# Altium PCB LED_Array.PcbDoc
Units mil, origin at the board's own origin, x right, y up, seen from the top; angles counter-clockwise.
Board outline 3000 x 3000 mil, 2 copper layers (Top Layer, Bottom Layer); 17 components, 16 nets, 50 pads, 2 vias.
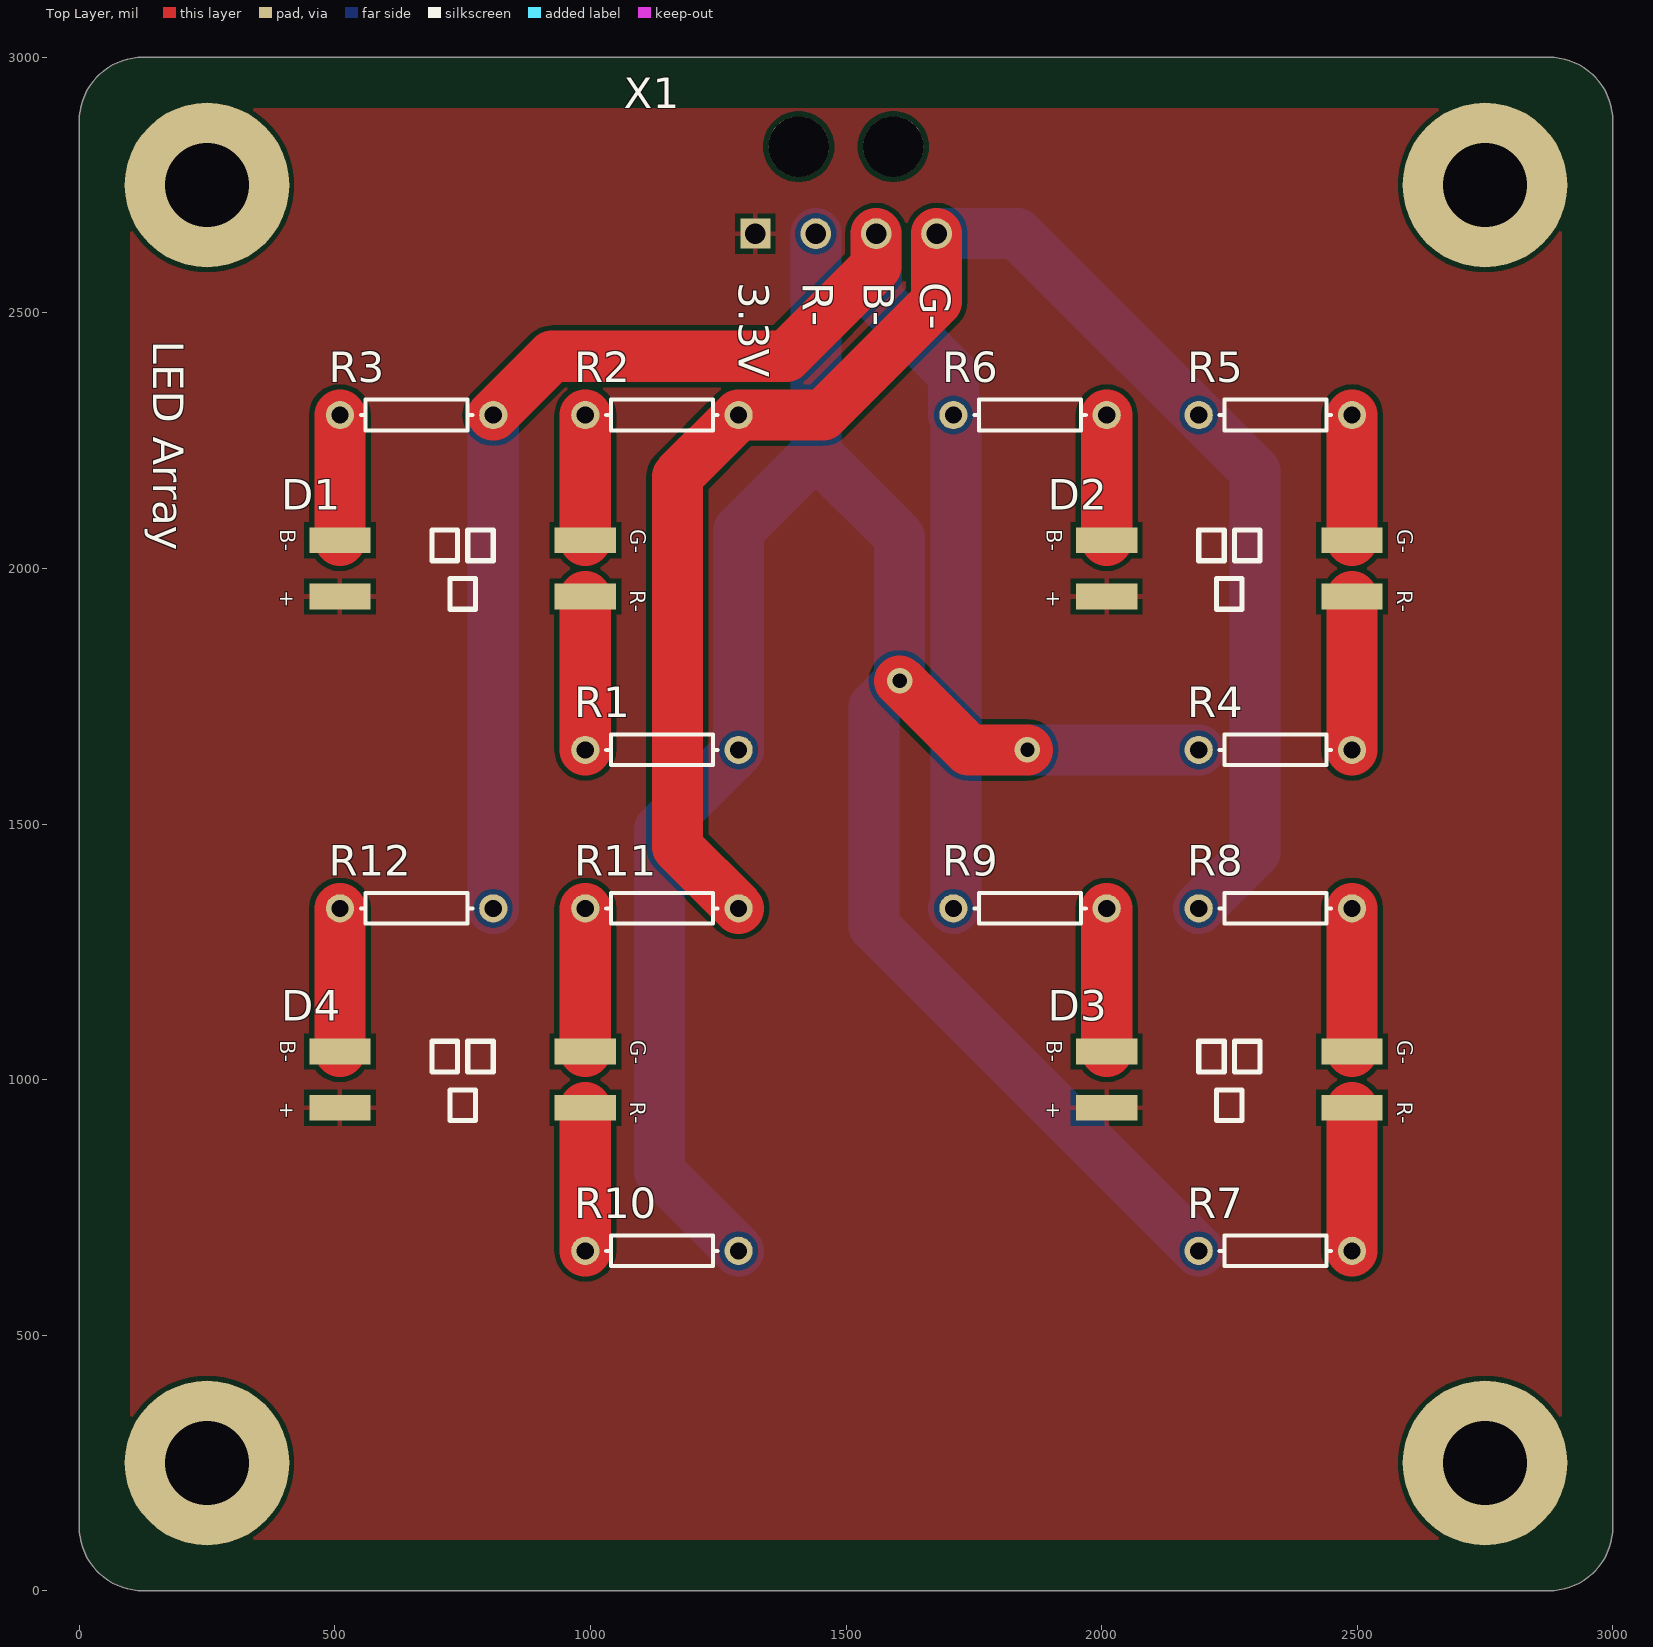
[diagram p0: Top Layer view]
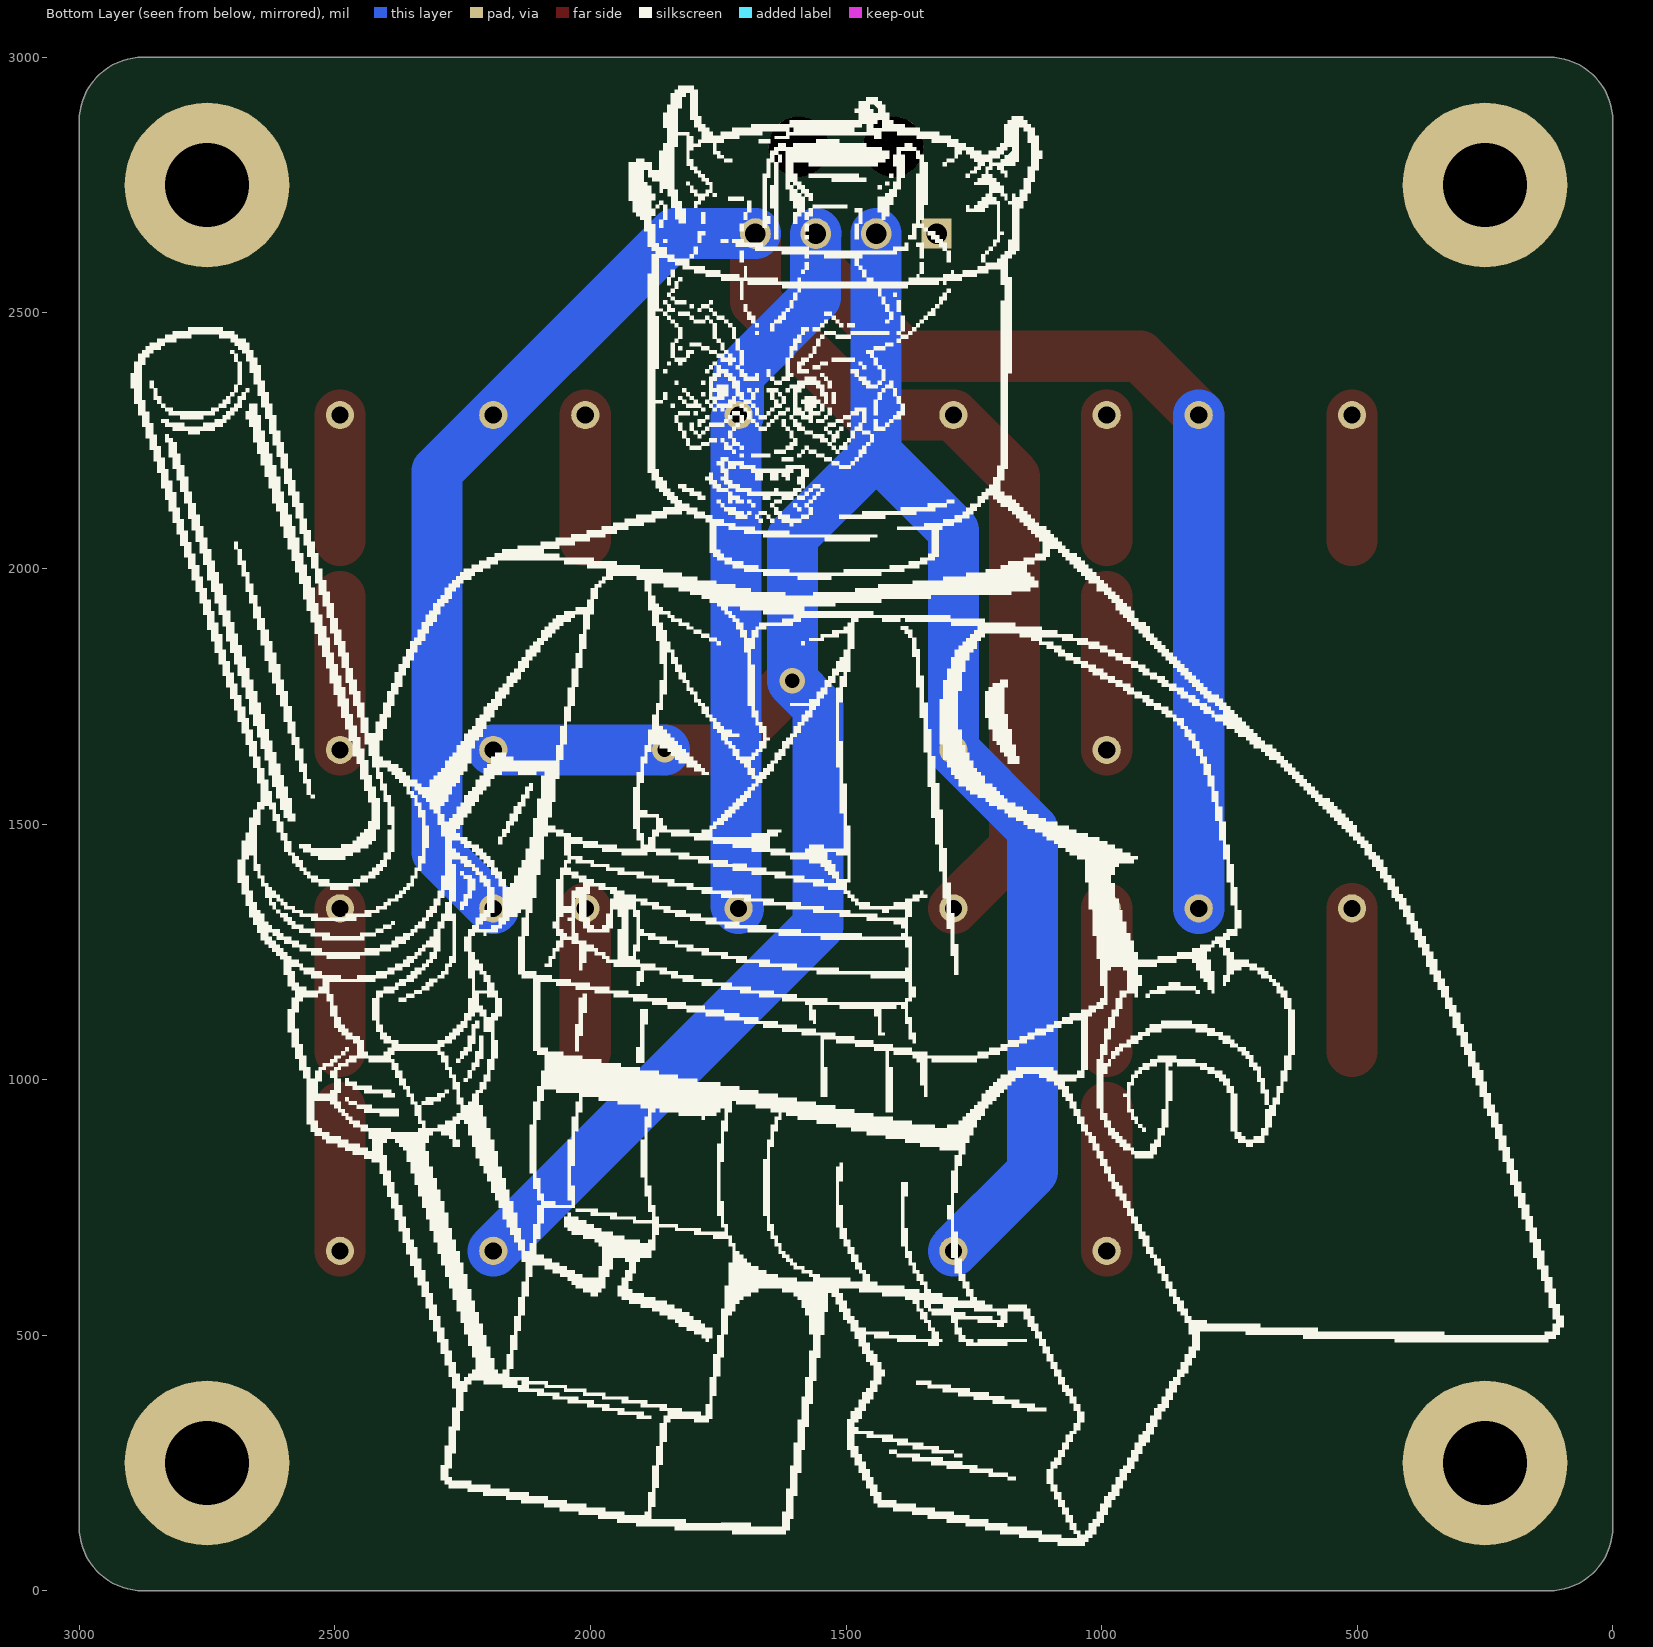
[diagram p1: Bottom Layer view, seen from below]

## Layer stack, top to bottom
Top Solder: solder mask 0.4, Solder Resist, Dk 3.5
Top Layer: signal copper 1.4
Dielectric 1: dielectric 12.6, FR-4, Dk 4.8
Bottom Layer: signal copper 1.4
Bottom Solder: solder mask 0.4, Solder Resist, Dk 3.5

## Board outline
0,125 0,2875 cw(c125,2875) 125,3000 2875,3000 cw(c2875,2875) 3000,2875 3000,125 cw(c2875,125) 2875,0 125,0 cw(c125,125)

## Design rules (kind name [scope] priority, off if disabled: settings)
Clearance [All] p1: gap=10 ignorepadtopadclearanceinfootprint=FALSE except(0: Arc-Hole Track-Hole SMDPad-Hole THPad-Hole Via-Hole Fill-Hole Poly-Hole Region-Hole Text-Hole)
PolygonConnect [All] p1: connectstyle=Relief reliefconductorwidth=10 reliefentries=4 polygonreliefangle="90 Angle" airgapwidth=10
RoutingVias [All] p1: holewidth=28 width=50 viastyle="Through Hole" minholewidth=28 minwidth=50 maxholewidth=28 maxwidth=50
SolderMaskExpansion [isVia] p1: expansion=4 istentingtop=TRUE
Width [All] p1: maxlimit=500 minlimit=10 preferedwidth=10 minimp=50.000000 maximp=50.000000 favimp=50.000000
30 further rules are at their usual default settings.

## Components (designator, comment, footprint, x,y, rotation, side; value= is the part's Value field where it differs from the comment)
D1 "RGBLED" RGBLED 750,2000 r270 top
D2 "RGBLED" RGBLED 2250,2000 r270 top
D3 "RGBLED" RGBLED 2250,1000 r270 top
D4 "RGBLED" RGBLED 750,1000 r270 top
R1 "Res1" AXIAL-0.3 1140,1645 r0 top
R2 "Res1" AXIAL-0.3 1140,2300 r0 top
R3 "Res1" AXIAL-0.3 660,2300 r0 top
R4 "Res1" AXIAL-0.3 2340,1645 r180 top
R5 "Res1" AXIAL-0.3 2340,2300 r180 top
R6 "Res1" AXIAL-0.3 1860,2300 r180 top
R7 "Res1" AXIAL-0.3 2340,665 r180 top
R8 "Res1" AXIAL-0.3 2340,1335 r180 top
R9 "Res1" AXIAL-0.3 1860,1335 r180 top
R10 "Res1" AXIAL-0.3 1140,665 r0 top
R11 "Res1" AXIAL-0.3 1140,1335 r0 top
R12 "Res1" AXIAL-0.3 660,1335 r0 top
X1 "Molex - Micro-Fit 3.0 Series connector,  3.00mm (0.118\") pitch header, 4 positions." 43650-0400 1500,2825 r180 top

## Footprints (in the part's own frame and the unit in brackets; to place one, negate y for a bottom-side part, rotate by r counter-clockwise, add the part's x,y. Pads: shape width x height; smd on the part's side, far side on the other; paste and mask are expansions set on the pad)
43650-0400 [mm]
  round 3 hole 3 unplated: 1(-2.35,0) 1(2.35,0)
  rect 1.482x1.482 / inner rect 1.524x1.524 / far side rect 1.482x1.482 hole 1.02: P$1(4.5,4.32)
  round 1.53 / inner round 1.524 / far side round 1.53 hole 1.02: P$2(1.5,4.32) P$3(-1.5,4.32) P$4(-4.5,4.32)
  body extent -7.82,-4.57 7.83,5.33, height 5.68
AXIAL-0.3 [mm] "Axial Device, Thru-Hole; 2 Leads; 0.3 in Pin Spacing"
  round 1.4 hole 0.85: 1(-3.81,0) 2(3.81,0)
  silkscreen extent -2.77,-0.76 2.77,0.76
RGBLED [mil]
  rect 50x120 smd: 0(55,-240) 1(55,240) 2(-55,240) 3(-55,-240)
  silkscreen extent -75,-60 80,60

## Part data
R1 R2 R3 R4 R5 R6 R7 R8 R9 R10 R11 R12: "Resistor", LatestRevisionDate=17-Jul-2002, LatestRevisionNote="Re-released for DXP Platform.", PackageDescription="Axial Device, Thru-Hole; 2 Leads; 0.3 in Pin Spacing", PackageReference=AXIAL-0.3, Published=8-Jun-2000, Publisher="Altium Limited"
X1: library part HEADER_POS4_?43650-0400, Package=43650-0409, DeviceName=43650-0409, DeviceSetName=HEADER_POS4_?, GateName_1=G$1, LibraryName=con-molex-micro-fit-3_0_2, SymbolName_1=HEADER_POS4

## Free pads (board coordinates)
  round 322 hole 164: ""(250,250) ""(250,2750) ""(2750,250) ""(2750,2750)

## Via types
v1: diameter 50, hole 28, Top Layer to Bottom Layer, tented both sides, 2 vias

## Nets (pads, with @x,y where several pads share a name; then routed paths per layer and width w, separated by ;. In a path a pad name is that pad's centre, name@x,y a point inside that pad or via, vN(x,y) a via of type N, cw(c..) or ccw(c..) an arc to the next point about the centre after c; other vN are vias at no path point)
3.3V: D1.0 D2.0 D3.0 D4.0 X1.P$1
B-: R3.2 R6.2 R9.2 R12.2 X1.P$3 | length 3285.1
  Top Layer w100: R3.2 925,2415 1383.12,2415 1559.06,2590.94 X1.P$3
  Bottom Layer w100: R12.2 R3.2 ; X1.P$3 1560,2653.98 1560,2530 1710,2380 R6.2 1715,2295 1715,1340 R9.2
G-: R2.2 R5.2 R8.2 R11.2 X1.P$4 | length 3392.3
  Top Layer w100: R11.2 1170,1455 1170,2180 R2.2 1455,2300 1677.17,2522.17 X1.P$4
  Bottom Layer w100: X1.P$4 1835.08,2654.92 2300,2190 2300,1445 R8.2
NetD1_1: D1.1 R1.1 | length 300
  Top Layer w100: R1.1 D1.1
NetD1_2: D1.2 R2.1 | length 245
  Top Layer w100: D1.2 R2.1
NetD1_3: D1.3 R3.1 | length 245
  Top Layer w100: D1.3 R3.1
NetD2_1: D2.1 R4.1 | length 300
  Top Layer w100: R4.1 D2.1
NetD2_2: D2.2 R5.1 | length 245
  Top Layer w100: D2.2 R5.1
NetD2_3: D2.3 R6.1 | length 245
  Top Layer w100: D2.3 R6.1
NetD3_1: D3.1 R7.1 | length 280
  Top Layer w100: R7.1 D3.1
NetD3_2: D3.2 R8.1 | length 280
  Top Layer w100: D3.2 R8.1
NetD3_3: D3.3 R9.1 | length 280
  Top Layer w100: D3.3 R9.1
NetD4_1: D4.1 R10.1 | length 280
  Top Layer w100: R10.1 D4.1
NetD4_2: D4.2 R11.1 | length 280
  Top Layer w100: D4.2 R11.1
NetD4_3: D4.3 R12.1 | length 280
  Top Layer w100: D4.3 R12.1
R-: R1.2 R4.2 R7.2 R10.2 X1.P$2 | length 4733.9
  Top Layer w100: v1(1605,1780) 1740,1645 v1(1855,1645)
  Bottom Layer w100: R10.2 1135,820 1135,1490 R1.2 1290,2074.49 1440.94,2225.43 ; X1.P$2 1440.94,2225.43 ; v1(1855,1645) R4.2 ; R7.2 1555,1300 1555,1730 v1(1605,1780) 1605,2061.37 1440.94,2225.43
pads on no net: X1.1

## Polygon pours and split planes (outlines as drawn)
3.3V on Top Layer "NONET_L02_P-001" (solid, pour order 0): 100,2900 100,100 2900,100 2900,2900

## Silkscreen, mask and mechanical layers (free items; w line width, h text height)
Top Overlay:
  text "3.3V" at 1290,2560 h60 r270
  text "R-" at 1415,2560 h60 r270
  text "B-" at 1535,2560 h60 r270
  text "G-" at 1645,2560 h60 r270
  text "LED Array" at 144.99,2445 h60 r270
Bottom Overlay:
  drawing of 353 lines, arcs and shapes, not listed
Outline:
  the board outline again, w10

## Text inside footprints (layer, text, board x,y; h text height)
D1: Top Overlay "R-" at 1078,1957 h30 r270; Top Overlay "G-" at 1078,2077 h30 r270; Top Overlay "B-" at 393,2077 h30 r270; Top Overlay "+" at 393,1957 h30 r270
D2: Top Overlay "R-" at 2578,1957 h30 r270; Top Overlay "G-" at 2578,2077 h30 r270; Top Overlay "B-" at 1893,2077 h30 r270; Top Overlay "+" at 1893,1957 h30 r270
D3: Top Overlay "R-" at 2578,957 h30 r270; Top Overlay "G-" at 2578,1077 h30 r270; Top Overlay "B-" at 1893,1077 h30 r270; Top Overlay "+" at 1893,957 h30 r270
D4: Top Overlay "R-" at 1078,957 h30 r270; Top Overlay "G-" at 1078,1077 h30 r270; Top Overlay "B-" at 393,1077 h30 r270; Top Overlay "+" at 393,957 h30 r270